# Altium PCB PCB.PcbDoc
Units mil, origin at the board's own origin, x right, y up, seen from the top; angles counter-clockwise.
Board outline 796.72 x 555 mil, 2 copper layers (Top Layer, Bottom Layer); 15 components, 11 nets, 66 pads, 4 vias.
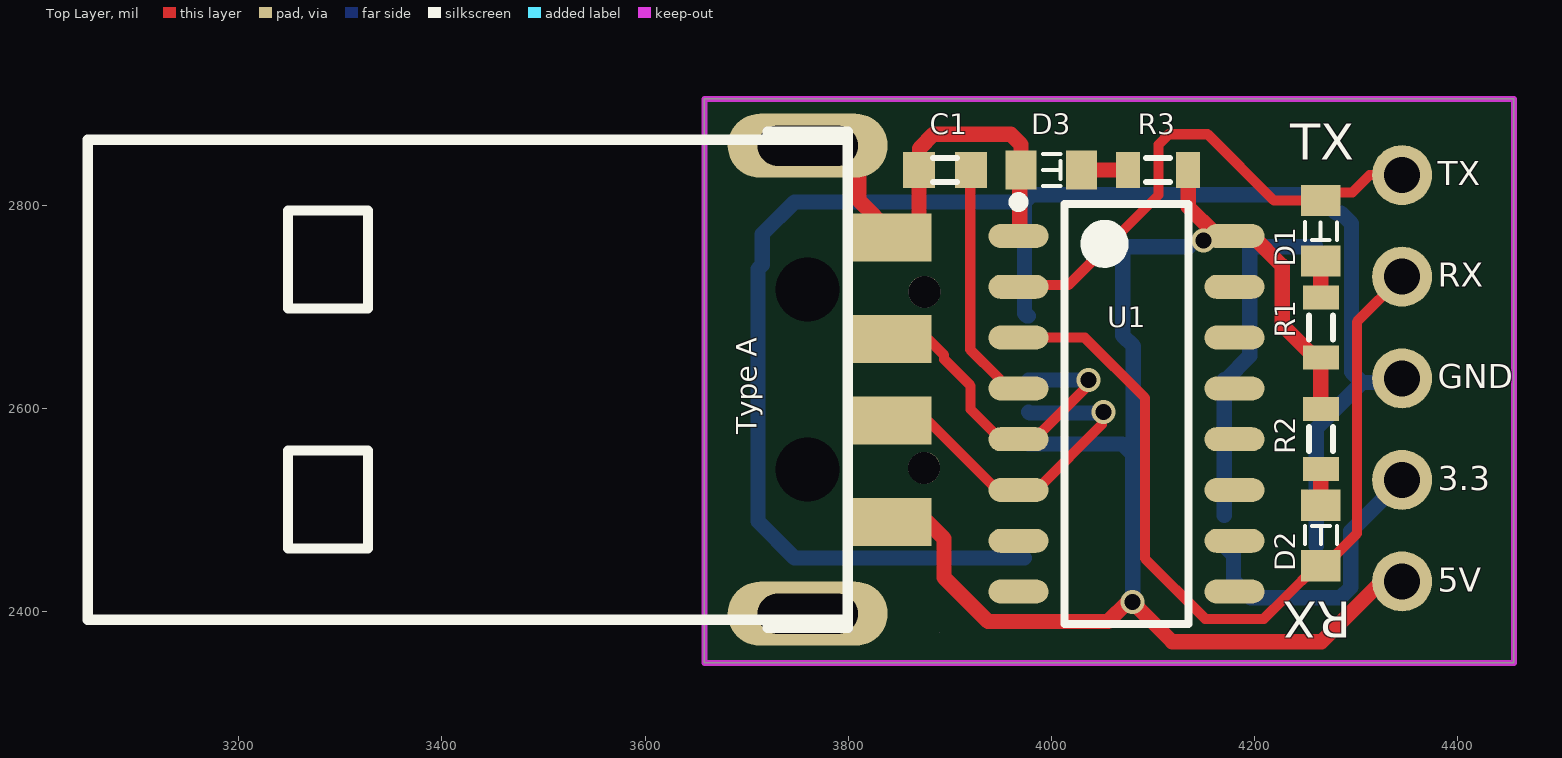
[diagram p0: Top Layer view]
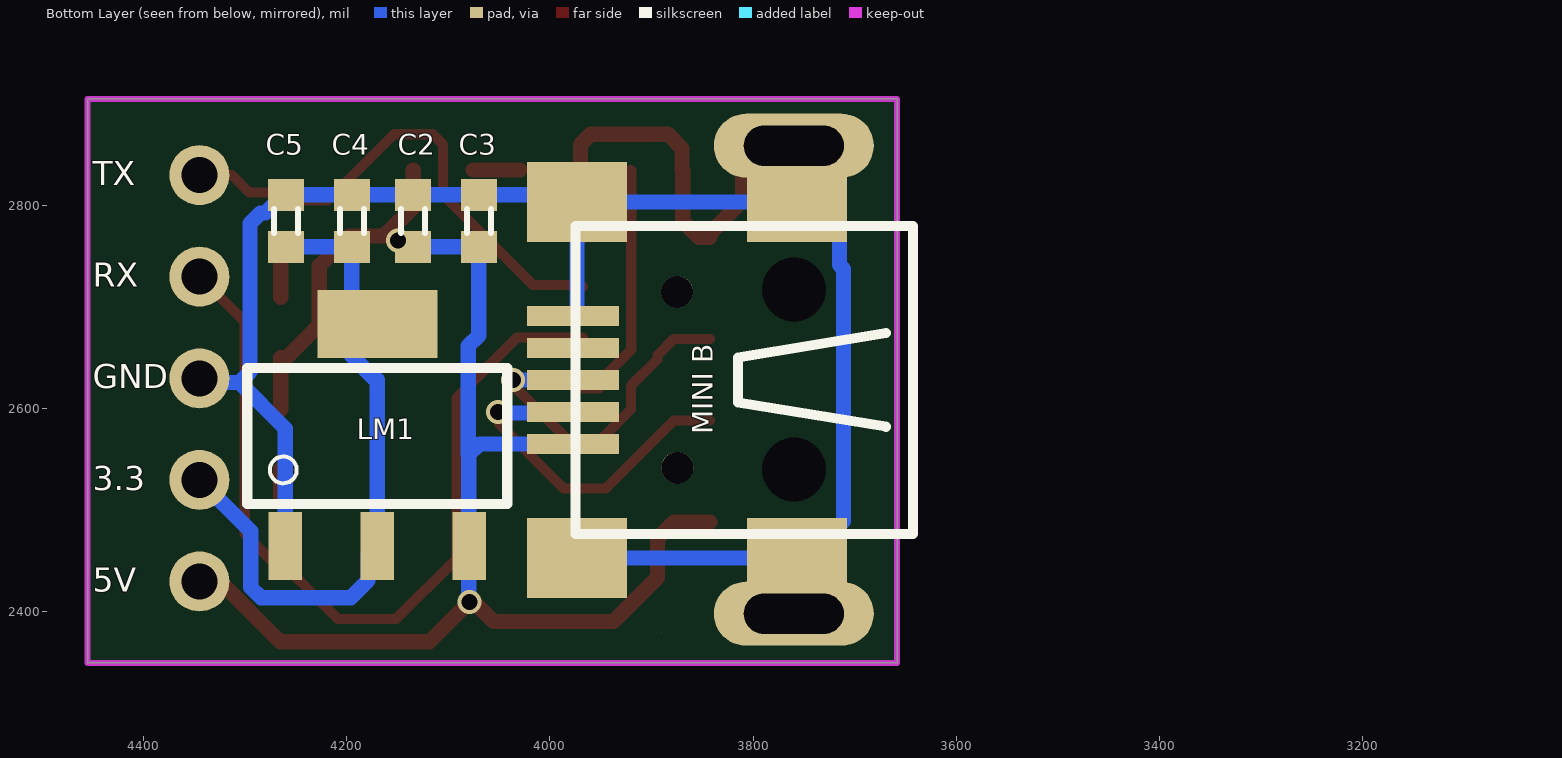
[diagram p1: Bottom Layer view, seen from below]

## Layer stack, top to bottom
Top Solder: solder mask 0.4, Solder Resist, Dk 3.5
Top Layer: signal copper 1.4
Dielectric 1: dielectric 12.6, FR-4, Dk 4.8
Bottom Layer: signal copper 1.4
Bottom Solder: solder mask 0.4, Solder Resist, Dk 3.5

## Board outline
3658.28,2350 3658.28,2905 4455,2905 4455,2350
cut-out: 3890,2380

## Design rules (kind name [scope] priority, off if disabled: settings)
Clearance [All] p1: gap=10 ignorepadtopadclearanceinfootprint=FALSE except(0: Arc-Hole Track-Hole SMDPad-Hole THPad-Hole Via-Hole Fill-Hole Poly-Hole Region-Hole Text-Hole)
ComponentClearance [All] p1: gap=10 collisioncheckmode=3 verticalgap=100000 showdistances=FALSE
DiffPairsRouting [All] p1: maxlimit=10 minlimit=10 mostfreqgap=10 toplayer_minwidth=15 toplayer_maxwidth=15 toplayer_prefwidth=15 bottomlayer_minwidth=15 bottomlayer_maxwidth=15 bottomlayer_prefwidth=15 maxuncoupledlength=500
PolygonConnect [All] p1: connectstyle=Relief reliefconductorwidth=10 reliefentries=4 polygonreliefangle="90 Angle" airgapwidth=10
RoutingVias [All] p1: holewidth=28 width=50 viastyle="Through Hole" minholewidth=28 minwidth=50 maxholewidth=28 maxwidth=50
SolderMaskExpansion [All] p1: expansion=4 istentingtop=FALSE
Width [All] p1: maxlimit=40 minlimit=10 preferedwidth=10
28 further rules are at their usual default settings.

## Classes and differential pairs
differential pair A: +A_P -A_N

## Components (designator, comment, footprint, x,y, rotation, side; value= is the part's Value field where it differs from the comment)
C1 "Cap" Cap_0603 3895,2835 r0 top value=0.1uF
C2 "Cap" Cap_0603 4135,2785 r90 bottom value=10uF
C3 "Cap" Cap_0603 4070,2785 r90 bottom value=1uF
C4 "Cap" Cap_0603 4195,2785 r90 bottom value=1uF
C5 "Cap" Cap_0603 4260,2785 r90 bottom value=0.1uF
D1 "LED" SMD-0603_LED 4265,2745.55 r90 top
D2 "LED" SMD-0603_LED 4265,2505 r270 top
D3 "LED" SMD-0603_LED 4029.45,2835 r180 top
LM1 "LM1117" SOT-223 4297.95,2640.2 r180 bottom
"MINI B" "Micro/Mini" USB_Mini-B_S_SMT 3805,2630 r0 bottom (schematic designator USB1)
R1 "Res" RES_0603 4265,2680 r90 top value=1K
R2 "Res" RES_0603 4265,2570 r270 top value=1K
R3 "Res" RES_0603 4105,2835 r180 top value=1K (schematic designator R?)
"Type A" "Standard" USB_Type-A_P_Thru-Hole 3799.37,2628.58 r0 top (schematic designator USB2)
U1 "CH340C" SOP127P600X265-16N 4073.7,2595 r0 top

## Footprints (in the part's own frame and the unit in brackets; to place one, negate y for a bottom-side part, rotate by r counter-clockwise, add the part's x,y. Pads: shape width x height; smd on the part's side, far side on the other; paste and mask are expansions set on the pad)
Cap_0603 [mm]
  rect 0.8x0.9 smd: 1(-0.65,0) 2(0.65,0)
  silkscreen extent -0.3,-0.3 0.3,0.3, body extent -0.8,-0.43 0.8,0.43, height 0.83
RES_0603 [mm]
  rect 0.6x0.9 smd: 1(-0.75,0) 2(0.75,0)
  silkscreen extent -0.3,-0.3 0.3,0.3, body extent -0.8,-0.43 0.8,0.43, height 0.48
SMD-0603_LED [mm]
  rect 0.78x0.98 smd: 1(0,0) 2(1.51,0)
  silkscreen extent 0.52,-0.4 0.97,0.4, body extent -0.08,-0.41 1.54,0.45, height 0.6
SOP127P600X265-16N [mm] "SOP, 16-Leads, Body 10.30x3.90mm, Pitch 1.27mm, IPC Medium Density"
  oval 1.5x0.6 smd: 1(-2.7,4.445) 2(-2.7,3.175) 3(-2.7,1.905) 4(-2.7,0.635) 5(-2.7,-0.635) 6(-2.7,-1.905) 7(-2.7,-3.175) 8(-2.7,-4.445) 9(2.7,-4.445) 10(2.7,-3.175) 11(2.7,-1.905) 12(2.7,-0.635) 13(2.7,0.635) 14(2.7,1.905) 15(2.7,3.175) 16(2.7,4.445)
  silkscreen extent -2.82,-5.25 1.55,5.42, body extent -1.95,-5.25 1.95,5.25, height 2.65
SOT-223 [mm]
  rect 0.84x1.7 smd: 1(0.95,-4.45) 2(3.25,-4.45) 3(5.55,-4.45)
  rect 3x1.7 smd: 2(3.25,1.1)
  silkscreen extent 0,-3.4 6.5,0
USB_Mini-B_S_SMT [mm]
  rect 2.3x0.5 smd: 1(4.378,1.64) 2(4.378,0.84) 3(4.378,0.04) 4(4.378,-0.76) 5(4.378,-1.56)
  round 0.8 hole 0.8: 4(1.768,2.24) 4(1.775,-2.159)
  rect 2.5x2 smd: ""(-1.222,-4.41) ""(-1.222,4.49) ""(4.278,-4.41) ""(4.278,4.49)
  silkscreen extent -4.12,-3.81 4.32,3.89
USB_Type-A_P_Thru-Hole [mm]
  rect 2x1.2 smd: 1(1.1,-3.56) 2(1.1,-1.02) 3(1.1,1.02) 4(1.1,3.56)
  oval 4x1.6 hole 1 slot 2.5 at 0 deg: ""(-1,-5.85) ""(-1,5.85)
  round 0 hole 1.6: ""(-1,-2.25) ""(-1,2.25)
  silkscreen extent -19,-6.2 0,6.2, body extent -18.68,-6.3 1.24,6.31, height 3.2

## Part data
"MINI B": library part USB2
"Type A": library part USB1

## Free pads (board coordinates)
  round 59.06 hole 35.43: 2(4345,2830) 3(4345,2730) 6(4345,2630) 7(4345,2530) 8(4345,2430)

## Via types
v1: diameter 23.62, hole 15.75, Top Layer to Bottom Layer, 4 vias

## Nets (pads, with @x,y where several pads share a name; then routed paths per layer and width w, separated by ;. In a path a pad name is that pad's centre, name@x,y a point inside that pad or via, vN(x,y) a via of type N, cw(c..) or ccw(c..) an arc to the next point about the centre after c; other vN are vias at no path point)
3.3V: C4.1 C5.1 LM1.2 pad.7 | length 631.9
  Bottom Layer w15: LM1.2@4170,2465 4179.04,2455.96 4179.04,2430.96 4195.96,2414.04 4284.34,2414.04 4294.59,2424.29 4294.59,2479.59 pad.7 ; LM1.2@4170,2495 4170,2628.5 4171.54,2628.5 4195.01,2651.97 C4.1 C5.1
5V: "MINI B.1" "Type A.1" C2.1 C3.1 LM1.3 pad.8 R1.1 R2.1 R3.1 U1.16 | length 1429
  Top Layer w15: 3842.68,2488.43 3878.11,2488.43 3894.23,2472.3 3894.23,2434 3937.54,2390.69 4055.69,2390.69 v1@4075,2410 ; v1(4079.45,2410) 4118.76,2370.69 4265.69,2370.69 pad.8@4325,2430 ; R3.1 4134.52,2798.74 4160.47,2772.79 4163.26,2770 U1.16 4197.72,2770 4227.07,2740.64 4227.07,2682.49 4259.09,2650.48 R1.1 ; R2.1 R1.1
  Bottom Layer w15: 3977.36,2565.43 4069.57,2565.43 4080,2555 ; v1(4079.45,2410) 4080,2410.55 4080,2555 ; C2.1 C3.1 4070.01,2672.13 4080.51,2661.63 4080.51,2555.51 4080,2555
  other v1: 4149.77,2765.39
A_N: "MINI B.3" "Type A.3" U1.5 | length 336.7
  Top Layer w10: 3842.68,2668.74 3878.11,2668.74 3894.23,2652.62 3894.23,2648.65 3920.37,2622.5 3920.37,2599.31 3949.68,2570 3983.04,2570 4034.73,2621.7 4034.73,2626.71 v1(4036.38,2628.36)
  Bottom Layer w15: 3977.39,2628.39 v1(4036.38,2628.36)
A_P: "MINI B.2" "Type A.2" U1.6 | length 348.1
  Top Layer w10: 3842.68,2588.43 3878.11,2588.43 3944.89,2521.65 3986.77,2521.65 4049.55,2584.43 4049.55,2593.09 4051.2,2594.74 v1(4051.2,2596.71)
  Bottom Layer w15: 3977.36,2596.93 3978.45,2595.84 4050.33,2595.84 v1(4051.2,2596.71)
GND: "MINI B.5" "MINI B." "Type A.4" "Type A."@3760,2398.27 "Type A."@3760,2858.9 C1.1 C2.2 C3.2 C4.2 C5.2 D3.2 LM1.1 pad.6 U1.1 | length 2112.8
  Top Layer w15: 3760,2858.9 3788.28,2858.9 3810.45,2836.73 3810.45,2804.9 3842.68,2772.68 3842.68,2768.74 3853.29,2768.74 3869.41,2784.86 C1.1 3870,2835.6 3870,2856.21 3884.01,2870.22 3959.78,2870.22 3970,2860 D3.2 3968.7,2833.7 3968.7,2771.3 U1.1
  Bottom Layer w15: 3973.43,2453.23 3756.89,2453.23 3747.05,2453.23 3711,2489.27 3711,2737.46 3715.18,2741.63 3715.18,2771.75 3747.05,2803.62 3756.89,2803.62 3973.43,2803.62 ; 3977.36,2691.42 3975.77,2691.42 3973.43,2693.76 3973.43,2803.62 ; LM1.1 4260.55,2580.55 4305.71,2625.71 ; pad.6 4340.71,2625.71 4305.71,2625.71 ; 3973.43,2803.62 3980.39,2810.59 C3.2 C2.2 C4.2 C5.2 4261.97,2810.59 4279.91,2792.66 4284.97,2792.66 4295.22,2782.41 4295.22,2636.2 4305.71,2625.71
NetC1_2: C1.2 U1.4 | length 243.9
  Top Layer w10: C1.2 3920,2834.42 3920,2658.23 3948.04,2630.2 3948.04,2623.98 3952.02,2620 U1.4
NetD1_1: D1.1 R1.2 | length 36
  Top Layer w15: R1.2 D1.1@4265,2745.55
NetD2_1: D2.1 R2.2 | length 37.6
  Top Layer w15: D2.1@4260,2505 4265,2510 R2.2
NetD3_1: D3.1 R3.2 | length 46
  Top Layer w15: D3.1@4029.45,2835 R3.2
RX: D2.2 pad.3 U1.3 | length 846.6
  Top Layer w10: U1.3 4032.66,2670 4091.92,2610.74 4091.92,2452.45 4151.18,2393.19 4208.82,2393.19 4229.77,2414.13 4229.77,2414.25 4261.06,2445.55 D2.2 4268.94,2445.55 4300.47,2477.09 4300.47,2685.47 pad.3
TX: D1.2 pad.2 U1.2 | length 486.2
  Top Layer w10: U1.2 3969.05,2721.65 4016.4,2721.65 4105.21,2810.46 4105.21,2859.96 4115.46,2870.21 4153.58,2870.21 4218.79,2805 D1.2 4272.85,2812.85 4295.93,2812.85 4313.08,2830 pad.2@4325,2830
pads on no net: "MINI B.4" "Type A."@3760,2540 "Type A."@3760,2717.17 U1.7 U1.8 U1.9 U1.10 U1.11 U1.12 U1.13 U1.14 U1.15

## Keep-outs
Keep-Out Layer:
  the board outline again, w5.91

## Silkscreen, mask and mechanical layers (free items; w line width, h text height)
Top Overlay:
  text "TX" at 4235,2845 h35.43
  text "TX" at 4380,2820 h23.62
  text "RX" at 4380,2720 h23.62
  text "GND" at 4380,2620 h23.62
  text "3.3" at 4380,2520 h23.62
  text "5V" at 4380,2420 h23.62
  text "RX" at 4295,2410 h35.43 r180
Bottom Overlay:
  text "TX" at 4450,2820 h23.62
  text "RX" at 4450,2720 h23.62
  text "GND" at 4450,2620 h23.62
  text "3.3" at 4450,2520 h23.62
  text "5V" at 4450,2420 h23.62